# EAGLE board PCB v46 (EAGLE 9.7.0)
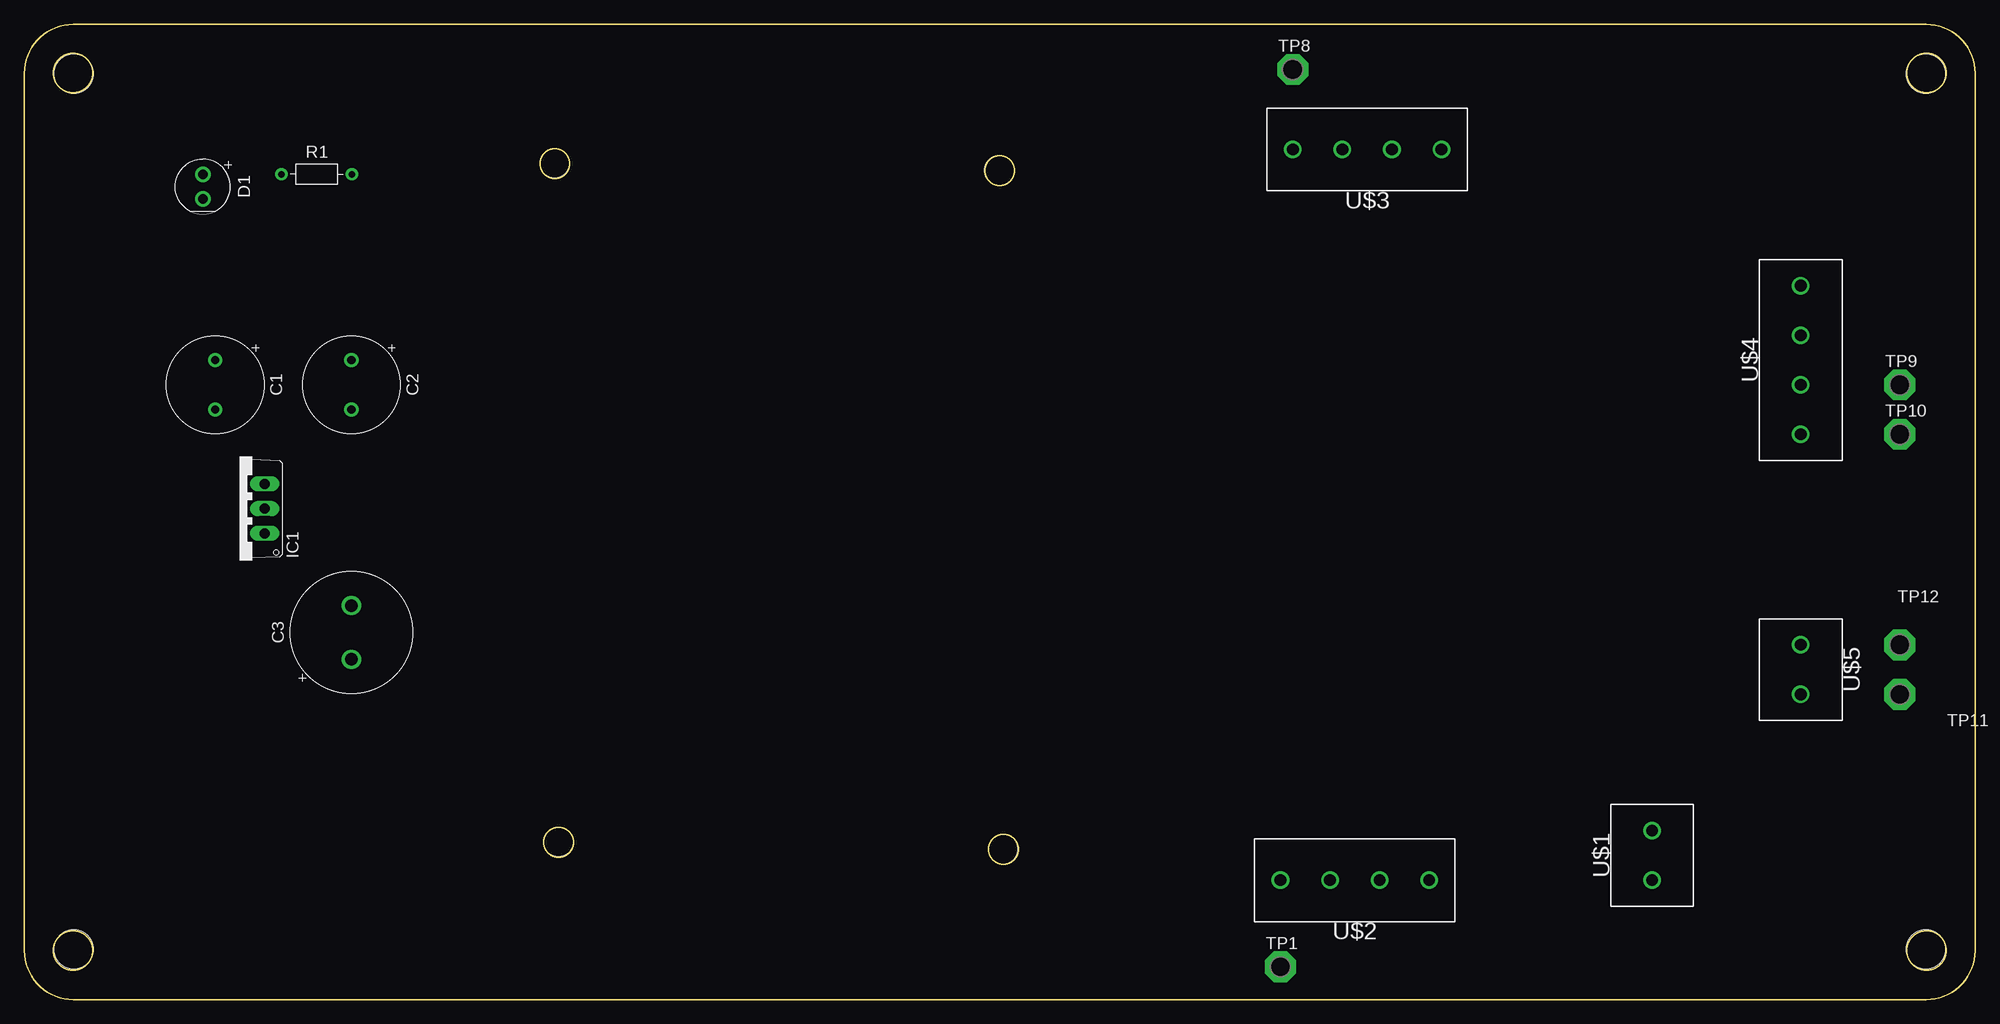
[diagram p0: board, top side]
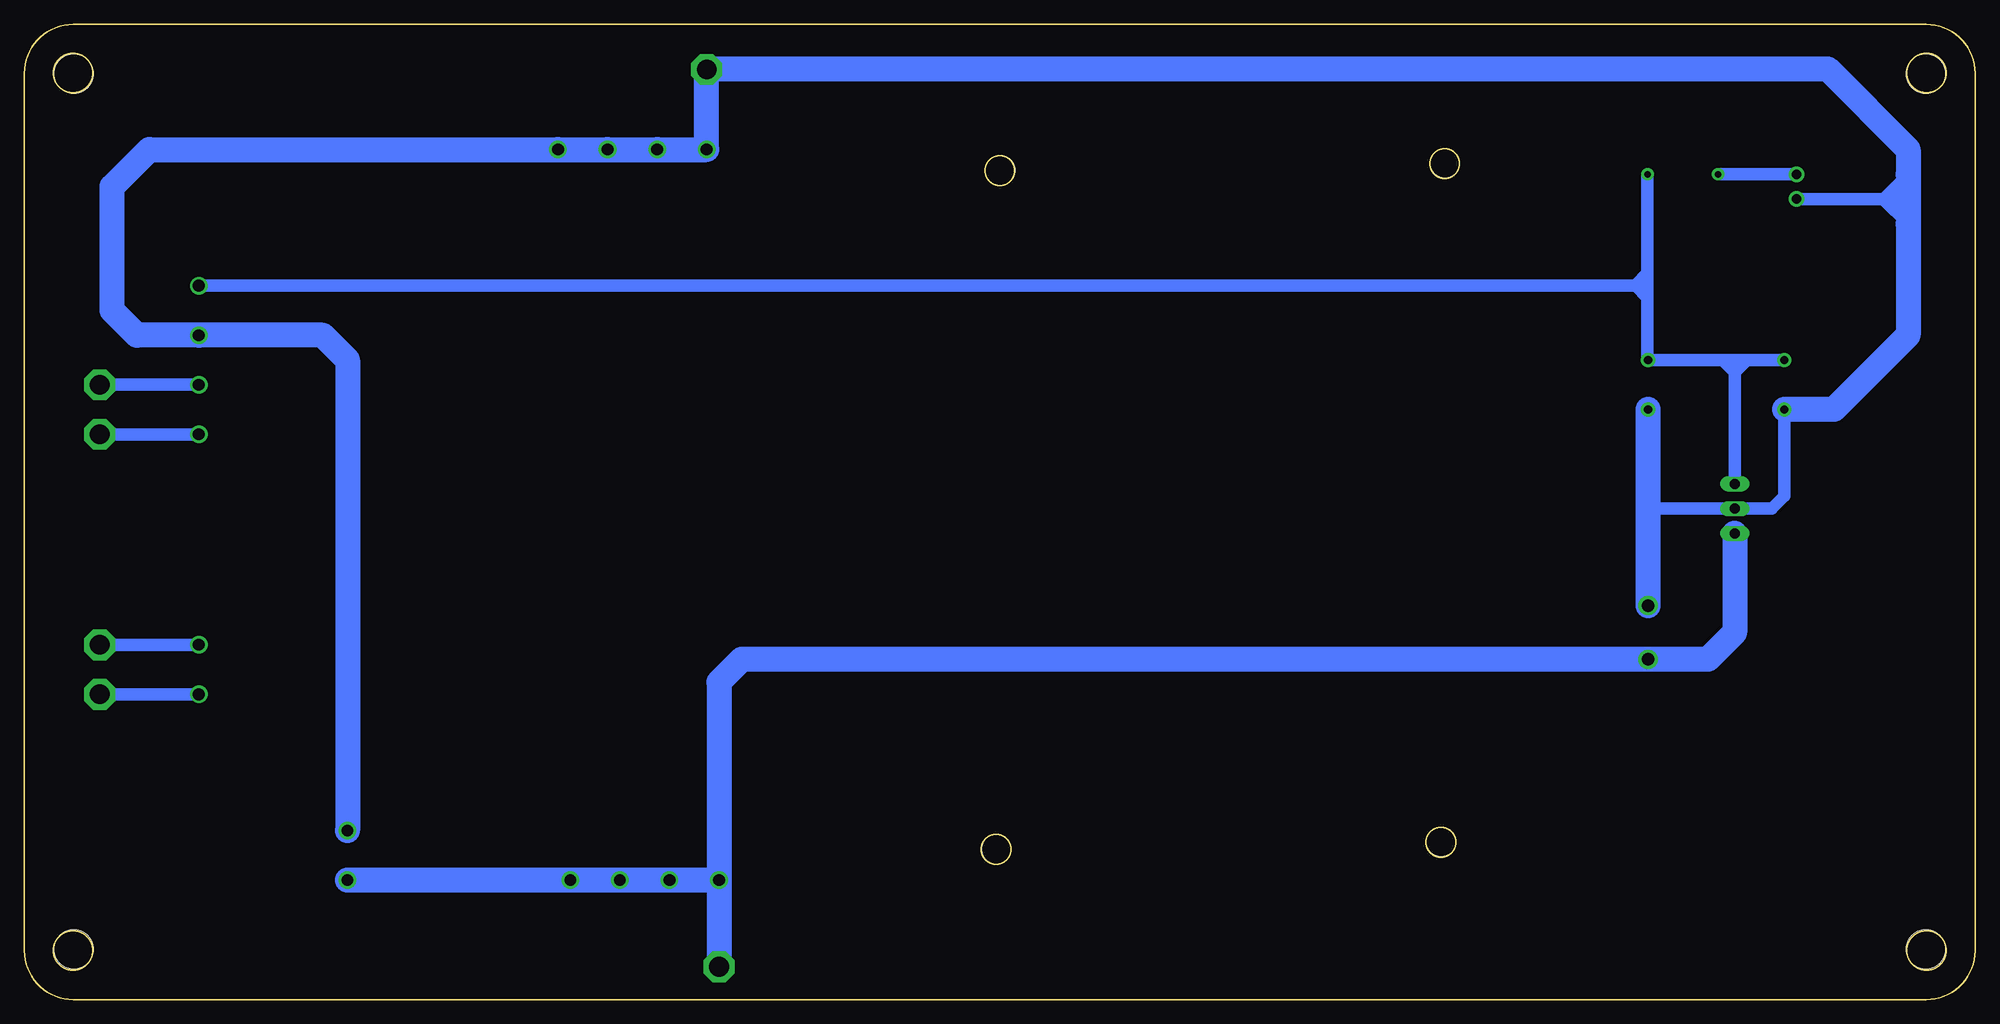
[diagram p1: board, bottom side, seen from below]

Size 200 x 100 mm. Coordinates in mm from the lower left corner, seen from the top.
Outline: 195,0 arc90 200,5 200,95 arc90 195,100 5,100 arc90 0,95 0,5 arc90 5,0 195,0
Outline: circle at 195,95 radius 2
Outline: circle at 195,5 radius 2
Outline: circle at 100.38,15.4 radius 1.5
Outline: circle at 5,95 radius 2
Outline: circle at 5,5 radius 2
Outline: circle at 54.4,85.73 radius 1.5
Outline: circle at 100,85 radius 1.5
Outline: circle at 54.78,16.13 radius 1.5
Copper layers (1*16): Top / Bottom
Stack-up Default Layer Stack: Top User Defined 0.035mm / Dielectric-1 User Defined 1.5mm / Bottom User Defined 0.035mm
Design rules "default": minimum track width 6mil, minimum drill 0.35mm, track to track 6mil, track to pad 6mil, pad to pad 6mil, via to via 6mil, smd to smd 6mil, copper to edge 40mil, drill to drill 6mil, minimum pad ring 10mil, minimum via ring 8mil, stop-mask expansion 4mil, vias tented up to drill 0mil, thermal gap 10mil
Holes 4 mm at 5.08,94.92 5.08,5.13 194.94,5.13 194.94,94.92
Holes 3 mm at 54.36,85.78 99.95,85.01 54.74,16.18 100.33,15.42

## Footprints (pad centres in the part's own frame; a part is rotated, then mirrored left to right if it is on the bottom)
CAPPRD508W65D1000H1100B = drill 0.85 pad 1.45: 1 -2.54,0; 2 2.54,0
CAPPRD550W110D1250H2500B = drill 1.3 pad 1.95: 1 -2.75,0; 2 2.75,0
LEDRD254W60D565H860B_O = drill 0.981 pad 1.581: 1 -1.27,0; 2 1.27,0
TO220V = drill 1.016 long: 1 -2.54,-2.54; 2 0,-2.54; 3 2.54,-2.54
RESAD724W46L381D178B = drill 0.66 pad 1.26: 1 -3.62,0; 2 3.62,0
P1-20 = drill 2.007 pad 3.15 octagon: TP 0,0
TERMBLK_508-2N = drill 1.2: 1 0,0; 2 5.08,0
TERMBLK_508-4N = drill 1.2: 1 0,0; 2 5.08,0; 3 10.16,0; 4 15.24,0

## Placement (x,y rotation side)
C1  0.1uF  [CAPPRD508W65D1000H1100B]  19.56,63.04 270 top
C2  0.1uF  [CAPPRD508W65D1000H1100B]  33.53,63.04 270 top
C3  0.33uF  [CAPPRD550W110D1250H2500B]  33.53,37.64 90 top
D1  LED_ORANGE  [LEDRD254W60D565H860B_O]  18.29,83.36 270 top
IC1  7805TV  [TO220V]  22.1,50.34 90 top
R1  330  [RESAD724W46L381D178B]  29.97,84.63 0 top
TP1  TPPAD1-20  [P1-20]  128.78,3.35 0 top
TP8  TPPAD1-20  [P1-20]  130.05,95.38 0 top
TP9  TPPAD1-20  [P1-20]  192.28,63.04 0 top
TP10  TPPAD1-20  [P1-20]  192.28,57.96 0 top
TP11  TPPAD1-20  [P1-20]  192.28,31.29 0 top
TP12  TPPAD1-20  [P1-20]  192.28,36.37 0 top
U$1  2828XX-2282837-2  [TERMBLK_508-2N]  166.88,17.32 270 top
U$2  2828XX-4282837-4  [TERMBLK_508-4N]  128.78,12.24 0 top
U$3  2828XX-4282837-4  [TERMBLK_508-4N]  130.05,87.17 0 top
U$4  2828XX-4282837-4  [TERMBLK_508-4N]  182.12,73.2 270 top
U$5  2828XX-2282837-2  [TERMBLK_508-2N]  182.12,31.29 90 top

## Library data of the parts
C1-C3 = Capacitor; CATEGORY: Capacitor
D1 = Tinkercad; CATEGORY: Opto-Electronic; SUB-CATEGORY: LED
IC1 = linear
R1 = Resistor; CATEGORY: Resistor; SUB-CATEGORY: Fixed
TP1 TP8-TP12 = testpad
U$1 = Connector; CATEGORY: Connector; DESCRIPTION: 2 Position Wire to Board Terminal Block Horizontal with Board 5.08 mm Through Hole; MANUFACTURER: TE Connectivity; MPN: 282837-2; OPERATING_TEMPERATURE: -40°C to +105°C; PART_STATUS: ACTIVE; ROHS_COMPLIANCE: RoHS Compliant; SERIES: 282837; SPICEPREFIX: B; SUBCATEGORY: Terminal Block; TYPE: Side Wire Entry
U$2-U$4 = Connector; CATEGORY: Connector; DESCRIPTION: TERM BLK 4P SIDE ENT 5.08mm PCB; MANUFACTURER: TE Connectivity; MPN: 282837-4; OPERATING_TEMPERATURE: 40°C to +105°C; PART_STATUS: Active; ROHS_COMPLIANCE: RoHS Compliant; SERIES: 283737; SUBCATEGORY: Terminal Block; TYPE: Side Wire Entry
U$5 = Connector; CATEGORY: Connector; DESCRIPTION: 2 Position Wire to Board Terminal Block Horizontal with Board 5.08 mm Through Hole; MANUFACTURER: TE Connectivity; MPN: 282837-2; OPERATING_TEMPERATURE: -40°C to +105°C; PART_STATUS: ACTIVE; ROHS_COMPLIANCE: RoHS Compliant; SERIES: 282837; SUBCATEGORY: Terminal Block; TYPE: Side Wire Entry

## Nets
+5V: C1.1 C2.1 IC1.3 R1.2 U$4.1
+12V: C3.1 IC1.1 TP1.TP U$1.2 U$2.1 U$2.2 U$2.3 U$2.4
GND: C1.2 C2.2 C3.2 D1.2 IC1.2 TP8.TP U$1.1 U$3.1 U$3.2 U$3.3 U$3.4 U$4.2
IN1: TP9.TP U$4.3
IN2: TP10.TP U$4.4
IN3: TP11.TP U$5.1
IN4: TP12.TP U$5.2
N$2: D1.1 R1.1

## Tracks (layer width: path | path; a pad name or v marks a point on that pad's centre or on a via)
+5V
  Bottom 1.27: 33.59,72 33.59,65.65 C2.1 25.91,65.58 | 33.59,72 33.59,73.2 | 33.59,73.2 33.59,74.47 | R1.2 33.59,74.47 | 23.37,65.58 C1.1 | 23.37,65.58 24.64,65.58 | 24.64,65.58 25.91,65.58 | IC1.3 24.64,64.31 | 24.64,64.31 24.64,65.58 | 23.37,65.58 24.64,64.31 | 24.64,64.31 25.91,65.58 | U$4.1 34.8,73.2 | 34.8,73.2 33.59,73.2 | 33.59,74.47 34.8,73.27 34.8,73.2 | 34.8,73.2 33.59,72
+12V
  Bottom 2.54: U$2.1 TP1.TP | U$2.1 U$2.2 U$2.3 U$2.4 U$1.2 | IC1.1 24.64,37.64 27.39,34.89 C3.1 126.45,34.89 128.78,32.56 U$2.1
GND
  Bottom 1.27: 33.53,50.34 IC1.2 20.83,50.34 19.56,51.61 C1.2 | TP8.TP 130,95.43 | D1.2 9.4,82.09 | 9.4,82.09 6.86,84.63 | 9.4,82.09 6.86,82.09 | 6.86,79.55 9.4,82.09
  Bottom 2.54: TP8.TP U$3.1 U$3.2 U$3.3 U$3.4 187.2,87.17 191.01,83.36 191.01,70.66 188.47,68.12 U$4.2 169.42,68.12 166.88,65.58 U$1.1 | C1.2 14.48,60.5 6.86,68.12 6.86,79.55 6.86,82.09 6.86,84.63 6.86,87.17 15.11,95.43 130,95.43 | C2.2 33.53,50.34 C3.2
IN1
  Bottom 1.27: TP9.TP U$4.3
IN2
  Bottom 1.27: TP10.TP U$4.4
IN3
  Bottom 1.27: TP11.TP U$5.1
IN4
  Bottom 1.27: TP12.TP U$5.2
N$2
  Bottom 1.27: R1.1 D1.1